# Altium PCB Top.PcbDoc
Units mm, origin at the board's own origin, x right, y up, seen from the top; angles counter-clockwise.
Board outline 22 x 20 mm, 2 copper layers (Top Layer, Bottom Layer); 15 components, 22 nets, 80 pads, 37 vias.
Unrouted connection lines stored in the file: 14.
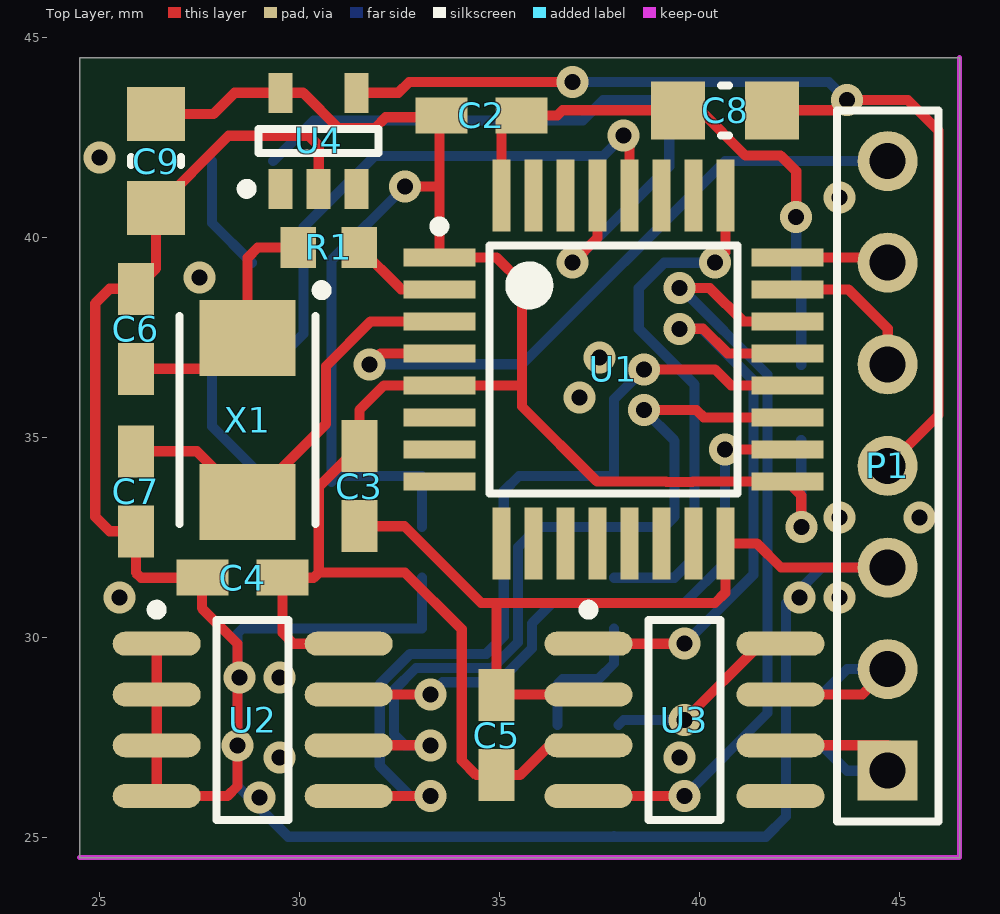
[diagram p0: Top Layer view]
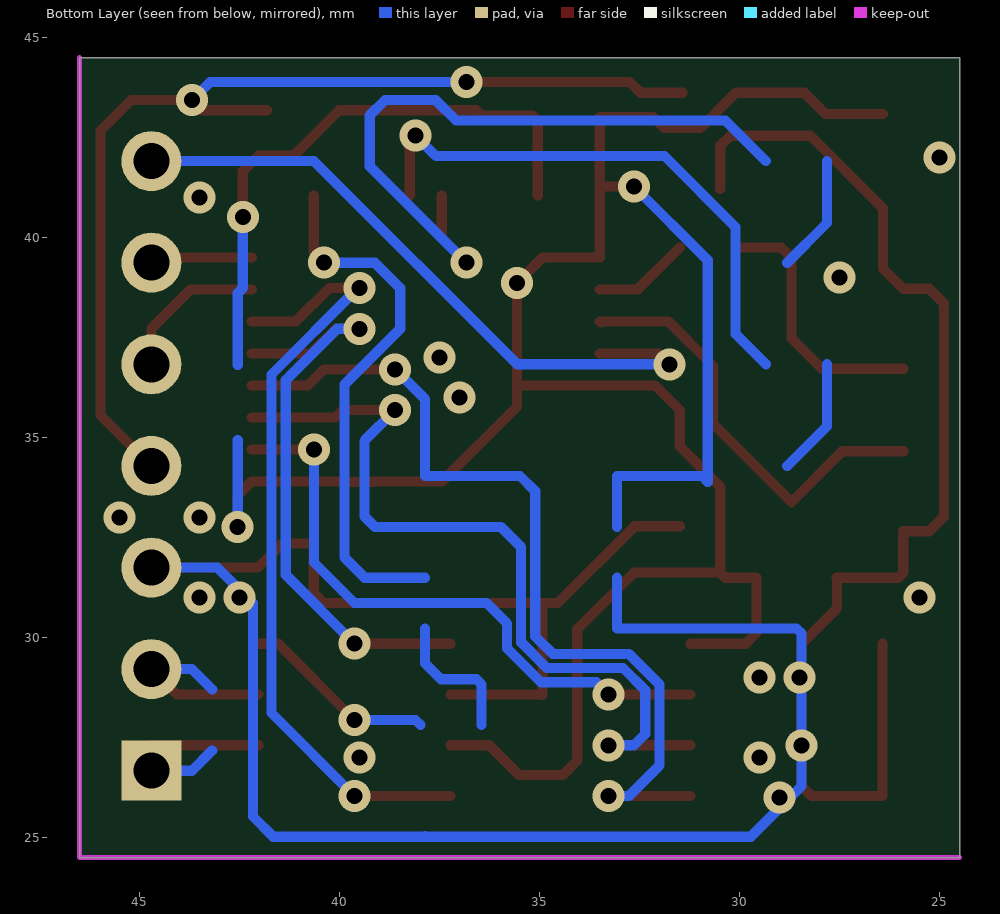
[diagram p1: Bottom Layer view, seen from below]

## Layer stack, top to bottom
Top Solder: solder mask 0.0102, Solder Resist, Dk 3.5
Top Layer: signal copper 0.0356
Dielectric 1: dielectric 0.32, FR-4, Dk 4.8
Bottom Layer: signal copper 0.0356
Bottom Solder: solder mask 0.0102, Solder Resist, Dk 3.5

## Board outline
24.5,24.5 46.5,24.5 46.5,44.5 24.5,44.5

## Design rules (kind name [scope] priority, off if disabled: settings)
Clearance [All] p1: gap=0.1
MinimumSolderMaskSliver [All] p1: minsoldermaskwidth=0.1
PolygonConnect [All] p1: connectstyle=Relief reliefconductorwidth=0.254 reliefentries=4 polygonreliefangle="90 Angle" airgapwidth=0.254
RoomDefinition LaserLEDController [InComponentClass('LaserLEDController')] p1: confinementstyle=ConfineIn formatcopy=TRUE lockcomponents=FALSE outline 24.5,24.511 46.482,24.511 46.482,44.5 24.5,44.5
RoutingVias [All] p1: holewidth=0.711 width=1.27 viastyle="Through Hole" minholewidth=0.4 minwidth=0.8 maxholewidth=0.711 maxwidth=1.27
SolderMaskExpansion [All] p1: expansion=0.102
Width [All] p1: maxlimit=0.254 minlimit=0.254 preferedwidth=0.254
29 further rules are at their usual default settings.

## Components (designator, comment, footprint, x,y, rotation, side; value= is the part's Value field where it differs from the comment)
C2 "ChipCap" CAP0603 34.544,43.053 r180 top
C3 "ChipCap" CAP0603 31.496,33.782 r90 top
C4 "ChipCap" CAP0603 28.575,31.496 r180 top
C5 "ChipCap" CAP0603 34.925,27.559 r270 top
C6 "ChipCap" CAP0603 25.908,37.719 r270 top
C7 "ChipCap" CAP0603 25.908,33.655 r90 top
C8 "ChipCap" CAP0805 40.64,43.18 r0 top
C9 "ChipCap" CAP0805 26.416,41.91 r90 top
P1 "Header 7" HDR1X7 44.704,26.67 r90 top
R1 "ChipRes" RES0603 30.734,39.751 r180 top
U1 "STM32F042K6T6" LQFP32 37.846,36.703 r0 top
U2 "M24256" SOIC8 28.829,27.94 r0 top
U3 "MCP2551" SOIC8 39.624,27.94 r0 top
U4 "ST715M33R" SOT23-5 30.48,42.418 r90 top
X1 "XTAL" "ABM3 Ceramic Crystal" 28.702,35.433 r270 top

## Footprints (in the part's own frame and the unit in brackets; to place one, negate y for a bottom-side part, rotate by r counter-clockwise, add the part's x,y. Pads: shape width x height; smd on the part's side, far side on the other; paste and mask are expansions set on the pad)
"ABM3 Ceramic Crystal" [mm]
  rect 1.9x2.4 smd: 1(-2.05,0) 2(2.05,0)
  silkscreen extent -3.37,-1.7 2.6,1.97, body extent -2.5,-1.6 2.5,1.6, height 1.3
CAP0603 [mm]
  rect 1.3x0.9 smd: 1(-1,0) 2(1,0)
CAP0805 [mm]
  rect 1.35x1.45 smd: 1(-1.175,0) 2(1.175,0)
  silkscreen extent -0.1,-0.63 0.1,0.63, body extent -1,-0.62 1,0.63, height 0.3
HDR1X7 [mm] "Connector; Header; 7 Position"
  rect 1.5x1.5 hole 0.9: 1(0,0)
  round 1.5 hole 0.9: 2(2.54,0) 3(5.08,0) 4(7.62,0) 5(10.16,0) 6(12.7,0) 7(15.24,0)
  silkscreen extent -1.27,-1.27 16.51,1.27
LQFP32 [mm] "LQFP, 32-Leads, Body 7.00x7.00mm, Pitch 0.80mm, IPC Medium Density"
  rect 1.8x0.45 smd: 1(-4.35,2.8) 2(-4.35,2) 3(-4.35,1.2) 4(-4.35,0.4) 5(-4.35,-0.4) 6(-4.35,-1.2) 7(-4.35,-2) 8(-4.35,-2.8) 17(4.35,-2.8) 18(4.35,-2) 19(4.35,-1.2) 20(4.35,-0.4) 21(4.35,0.4) 22(4.35,1.2) 23(4.35,2) 24(4.35,2.8)
  rect 0.45x1.8 smd: 9(-2.8,-4.35) 10(-2,-4.35) 11(-1.2,-4.35) 12(-0.4,-4.35) 13(0.4,-4.35) 14(1.2,-4.35) 15(2,-4.35) 16(2.8,-4.35) 25(2.8,4.35) 26(2,4.35) 27(1.2,4.35) 28(0.4,4.35) 29(-0.4,4.35) 30(-1.2,4.35) 31(-2,4.35) 32(-2.8,4.35)
  silkscreen extent -4.47,-3.1 3.1,3.7
RES0603 [mil]
  rect 35x40 smd: 1(-30,0) 2(30,0)
SOIC8 [mm] "SOIC, 8-Leads, Body 4,90x3,90mm, Pitch 1,27mm, IPC Medium Density"
  oval 2.2x0.6 smd: 1(-2.4,1.905) 2(-2.4,0.635) 3(-2.4,-0.635) 4(-2.4,-1.905) 5(2.4,-1.905) 6(2.4,-0.635) 7(2.4,0.635) 8(2.4,1.905)
  silkscreen extent -2.52,-2.5 0.9,2.88, body extent -3,-2.45 3,2.45, height 1.61
SOT23-5 [mm] "SOT23, 5-Leads, Body 2.90x2.45mm, Pitch 0.95mm, IPC Medium Density"
  rect 1x0.6 smd: 1(-1.2,0.95) 2(-1.2,0) 3(-1.2,-0.95) 4(1.2,-0.95) 5(1.2,0.95)
  silkscreen extent -1.32,-1.5 0.3,1.92, body extent -1.4,-1.45 1.4,1.45, height 1.24

## Part data
C2 C3 C4 C5 C6 C7 C8 C9: "Capacitor"
P1: "Header, 7-Pin"
R1: "Chip resistor"
U1: "ARM Cortex-M0 Microcontroller"
U2: "256 Kbit I2C EEPROM"
U3: library part MCP2551-I/SN, "CAN Transceiver"
U4: "High input voltage - 85 mA LDO linear regulator"
X1: library part "ABM3 Ceramic SMD Crystal", "Quartz crystall oscillator"

## Via types
v1: diameter 0.8, hole 0.4, Top Layer to Bottom Layer, tented both sides, 37 vias

## Nets (pads, with @x,y where several pads share a name; then routed paths per layer and width w, separated by ;. In a path a pad name is that pad's centre, name@x,y a point inside that pad or via, vN(x,y) a via of type N, cw(c..) or ccw(c..) an arc to the next point about the centre after c; other vN are vias at no path point)
12V: C8.2 P1.4 U4.4 | length 26
  Top Layer w0.254: U4.4 32.47,43.618 32.736,43.884 v1(36.83,43.884) ; C8.2 43.434,43.18 v1(43.688,43.434) 45.212,43.434 45.974,42.672 45.974,35.56 P1.4
  Bottom Layer w0.254: v1(36.83,43.884) 43.238,43.884 v1(43.688,43.434)
CAN_RX: U1.22 U3.4 | length 19.9
  Top Layer w0.254: U3.4 v1(39.624,26.035) ; v1(39.497,38.735) 40.259,38.735 41.091,37.903 U1.22
  Bottom Layer w0.254: v1(39.497,38.735) 39.542,38.735 41.7,36.577 41.7,28.111 v1(39.624,26.035)
CAN_TX: U1.21 U3.1 | length 15
  Top Layer w0.254: U3.1 v1(39.624,29.845) ; v1(39.497,37.719) 40.088,37.719 40.704,37.103 U1.21
  Bottom Layer w0.254: v1(39.497,37.719) 40.057,37.719 41.346,36.43 41.346,31.567 v1(39.624,29.845)
CANH: P1.2 U3.7 | length 4.7
  Top Layer w0.254: U3.7 44.069,28.575 P1.2
  Bottom Layer w0.254: 43.18,28.702 43.688,29.21 P1.2
CANL: P1.1 U3.6 | length 5
  Top Layer w0.254: U3.6 44.704,27.305 P1.1
  Bottom Layer w0.254: 43.18,27.178 43.688,26.67 P1.1
GND: C2.1 C3.1 C4.2 C5.1 C6.1 C7.1 C8.1 C9.1 P1.3 U1.16 U1.32 U2.1 U2.2 U2.3 U2.4 U3.2 U4.2 | length 101.2
  Top Layer w0.254: U2.1 U2.2 U2.3 U2.4 28.194,26.035 28.448,26.289 v1(28.448,27.305) 28.448,29.845 27.559,30.734 27.559,31.48 C4.2 26.035,31.496 25.908,31.623 C7.1 25.257,32.655 24.892,33.02 24.892,38.354 25.257,38.719 C6.1 26.416,39.227 C9.1 28.226,42.545 30.226,42.545 30.48,42.291 U4.2 ; C3.1 32.623,32.782 34.544,30.861 40.386,30.861 40.646,31.121 U1.16 41.434,32.353 42.037,31.75 P1.3 ; 34.925,30.861 C5.1 34.941,28.575 U3.2 ; U1.32 35.046,42.92 35.179,43.053 C2.1 36.449,43.053 36.576,43.18 C8.1 40.015,43.18 41.148,42.047 42.027,42.047 42.418,41.656 v1(42.418,40.513)
  Bottom Layer w0.254: 33.06,31.496 33.06,30.226 28.575,30.226 28.448,30.099 v1(28.448,27.305) 28.448,26.289 29.718,25.019 37.846,25.019 ; 36.449,27.813 36.449,28.829 36.576,28.956 37.465,28.956 37.86,29.351 37.86,30.226 ; 37.86,25.033 37.846,25.019 ; v1(42.418,40.513) 42.418,38.735 42.545,38.608 42.545,36.814 ; P1.3 43.053,31.75 42.164,30.861 42.164,25.527 41.656,25.019 37.846,25.019
  other v1: 29,26 29.5,27 39.5,27 28.5,29 29.5,29 25.5,31 42.5,31 43.5,31 43.5,33 45.5,33 37,36 37.5,37 27.5,39 43.5,41 25,42
I2C1_SCL: U1.19 U2.6 | length 21
  Top Layer w0.254: U2.6 v1(33.274,27.305) ; v1(38.608,35.687) 39.918,35.687 40.102,35.503 U1.19
  Bottom Layer w0.254: v1(33.274,27.305) 32.639,27.305 32.358,27.586 32.358,28.682 32.913,29.237 34.818,29.237 35.46,29.879 35.46,32.258 35.968,32.766 37.86,32.766 39.116,32.766 39.378,33.028 39.378,34.917 v1(38.608,35.687)
I2C1_SDA: U1.20 U2.5 | length 22.5
  Top Layer w0.254: U2.5 v1(33.274,26.035) ; v1(38.608,36.703) 40.386,36.703 40.786,36.303 U1.20
  Bottom Layer w0.254: v1(33.274,26.035) 32.766,26.035 32.004,26.797 32.004,28.829 32.766,29.591 34.671,29.591 35.106,30.026 35.106,33.655 35.487,34.036 37.86,34.036 37.86,35.955 v1(38.608,36.703)
NetC6_2: C6.2 R1.2 X1.1 | length 6.5
  Top Layer w0.254: C6.2 27.938,36.719 X1.1 28.702,39.497 28.956,39.751 R1.2
NetC7_2: C7.2 U1.3 X1.2 | length 10.9
  Top Layer w0.254: C7.2 27.43,34.655 X1.2 30.665,35.346 30.665,36.786 31.782,37.903 U1.3 U1.3@33.464,37.871
NetLED1_2:  | length 3
  Bottom Layer w0.254: 27.813,36.83 27.813,35.282 28.805,34.29
NetLED2_2:  | length 3
  Bottom Layer w0.254: 27.813,41.91 27.813,40.362 28.805,39.37
NetR1_1: R1.1 U1.2 | length 2.4
  Top Layer w0.254: R1.1 32.544,38.703 U1.2
NetR2_2: U3.8 | length 4.9
  Top Layer w0.254: v1(39.624,27.94) 41.529,29.845 U3.8
  Bottom Layer w0.254: 37.973,27.813 38.1,27.94 v1(39.624,27.94)
NetR4_2: U1.28 | length 14.2
  Top Layer w0.254: v1(38.1,42.545) 38.246,42.399 U1.28
  Bottom Layer w0.254: 29.337,36.83 30.099,37.592 30.099,40.259 31.877,42.037 37.592,42.037 v1(38.1,42.545)
NetR5_2: U1.29 | length 17.3
  Top Layer w0.254: v1(36.83,39.37) 37.446,39.986 U1.29
  Bottom Layer w0.254: 29.337,41.91 30.353,42.926 37.084,42.926 37.592,43.434 38.862,43.434 39.243,43.053 39.243,41.783 v1(36.83,39.37)
NetU1_18: U1.18 U2.7 | length 15.5
  Top Layer w0.254: U2.7 v1(33.274,28.575) ; v1(40.64,34.703) U1.18
  Bottom Layer w0.254: v1(33.274,28.575) 33.582,28.883 34.964,28.883 35.814,29.733 35.814,30.353 36.322,30.861 39.624,30.861 40.64,31.877 v1(40.64,34.703)
NRESET: P1.7 U1.4 | length 16.9
  Top Layer w0.254: v1(31.75,36.83) 32.023,37.103 U1.4
  Bottom Layer w0.254: v1(31.75,36.83) 35.56,36.83 40.64,41.91 P1.7
SWDCLK: P1.6 U1.24 | length 2.6
  Top Layer w0.254: U1.24 44.571,39.503 P1.6
SWDIO: P1.5 U1.23 | length 3.8
  Top Layer w0.254: U1.23 43.72,38.703 44.704,37.719 P1.5
TOUT: U1.25 | length 13.5
  Top Layer w0.254: v1(40.386,39.37) 40.646,39.63 U1.25
  Bottom Layer w0.254: 37.86,31.496 39.37,31.496 39.878,32.004 39.878,36.322 38.481,37.719 38.481,38.735 39.116,39.37 v1(40.386,39.37)
VCC: C2.2 C3.2 C4.1 C5.2 C9.2 U1.1 U1.5 U1.17 U2.8 U3.3 U4.5 | length 64.2
  Top Layer w0.254: C9.2 27.845,43.085 28.378,43.618 U4.5 30.091,43.618 30.972,42.737 31.888,42.737 32.156,43.005 33.496,43.005 33.496,41.254 ; U2.8 29.845,29.845 29.575,30.115 C4.1 30.353,31.496 30.48,31.623 ; v1(32.639,41.275) 33.475,41.275 33.496,41.254 ; 35.56,36.303 U1.5 32.112,36.303 31.496,35.687 C3.2 30.48,33.766 30.48,31.623 ; U3.3 36.255,27.305 35.509,26.559 C5.2 34.42,26.559 34.055,26.924 34.055,30.207 32.639,31.623 30.48,31.623 ; v1(42.545,32.766) 42.545,33.554 U1.17 39.833,33.903 39.82,33.89 39.173,33.89 39.16,33.903 37.433,33.903 35.56,35.776 v1(35.56,38.862) 34.919,39.503 U1.1 33.496,41.254
  Bottom Layer w0.254: v1(32.639,41.275) 30.796,39.432 30.796,33.893 30.939,34.036 33.06,34.036 33.06,32.766 ; v1(42.545,32.766) 42.545,34.941
pads on no net: U1.6 U1.7 U1.8 U1.9 U1.10 U1.11 U1.12 U1.13 U1.14 U1.15 U1.26 U1.27 U1.30 U1.31 U3.5 U4.1 U4.3

## Keep-outs
Keep-Out Layer:
  lines w0.127: 24.5,24.5 46.5,24.5 46.5,44.5

## Silkscreen, mask and mechanical layers (free items; w line width, h text height)
Mechanical 1:
  lines w0.127: 24.5,39.5 15.5,39.5 15.5,24.5 24.5,24.5 55.5,24.5 55.5,39.5 46.5,39.5
Mechanical 13:
  lines w0.1: 26.538,31.75 25.273,31.75 25.273,35.555 26.543,35.555 26.543,31.755 ; 26.538,35.814 25.273,35.814 25.273,39.619 26.543,39.619 26.543,35.819 ; 26.829,25.781 25.527,25.781 25.527,26.289 26.829,26.289 ; 26.829,27.051 25.527,27.051 25.527,27.559 26.829,27.559 ; 26.829,28.321 25.527,28.321 25.527,28.829 26.829,28.829 ; 26.829,29.591 25.527,29.591 25.527,30.099 26.829,30.099 ; 29.337,41.91 29.337,40.767 29.845,40.767 29.845,41.91 ; 29.337,43.053 29.337,44.196 29.845,44.196 29.845,43.053 ; 30.226,41.91 30.226,40.767 30.734,40.767 30.734,41.91 ; 30.475,32.131 26.675,32.131 26.675,30.861 30.48,30.861 30.48,32.126 ; 30.829,25.781 32.131,25.781 32.131,26.289 30.829,26.289 ; 30.829,27.051 32.131,27.051 32.131,27.559 30.829,27.559 ; 30.829,28.321 32.131,28.321 32.131,28.829 30.829,28.829 ; 30.861,29.591 32.163,29.591 32.163,30.099 30.861,30.099 ; 30.861,35.682 30.861,31.882 32.131,31.882 32.131,35.687 30.866,35.687 ; 31.115,41.91 31.115,40.767 31.623,40.767 31.623,41.91 ; 31.115,43.053 31.115,44.196 31.623,44.196 31.623,43.053 ; 32.639,42.423 32.639,43.688 36.444,43.688 36.444,42.418 32.644,42.418 ; 34.29,29.459 34.29,25.659 35.56,25.659 35.56,29.464 34.295,29.464 ; 37.624,25.781 36.322,25.781 36.322,26.289 37.624,26.289 ; 37.624,27.051 36.322,27.051 36.322,27.559 37.624,27.559 ; 37.624,28.321 36.322,28.321 36.322,28.829 37.624,28.829 ; 37.624,29.591 36.322,29.591 36.322,30.099 37.624,30.099 ; 41.624,27.051 42.926,27.051 42.926,27.559 41.624,27.559 ; 41.624,28.321 42.926,28.321 42.926,28.829 41.624,28.829 ; 41.624,29.591 42.926,29.591 42.926,30.099 41.624,30.099 ; 41.656,25.781 42.958,25.781 42.958,26.289 41.656,26.289 ; 29.083,41.91 31.877,41.91 31.877,43.053 29.083,43.053 29.083,41.91 ; 29.337,39.116 32.131,39.116 32.131,40.493 29.337,40.493 29.337,39.116 ; 43.561,25.4 45.847,25.4 45.847,43.18 43.561,43.18 43.561,25.4
  lines w0.127: 24.5,24.511 46.101,24.511 46.5,24.511 46.5,44.5 24.5,44.5 24.5,24.511